# Altium PCB 24+Channel+PCB.pcbdoc (part 3 of 4)
Units mm, origin at the board's own origin, x right, y up, seen from the top; angles counter-clockwise.
Board outline 213.4 x 117.5 mm, 2 copper layers (Top Layer, Bottom Layer); 559 components, 339 nets, 1681 pads, 746 vias.
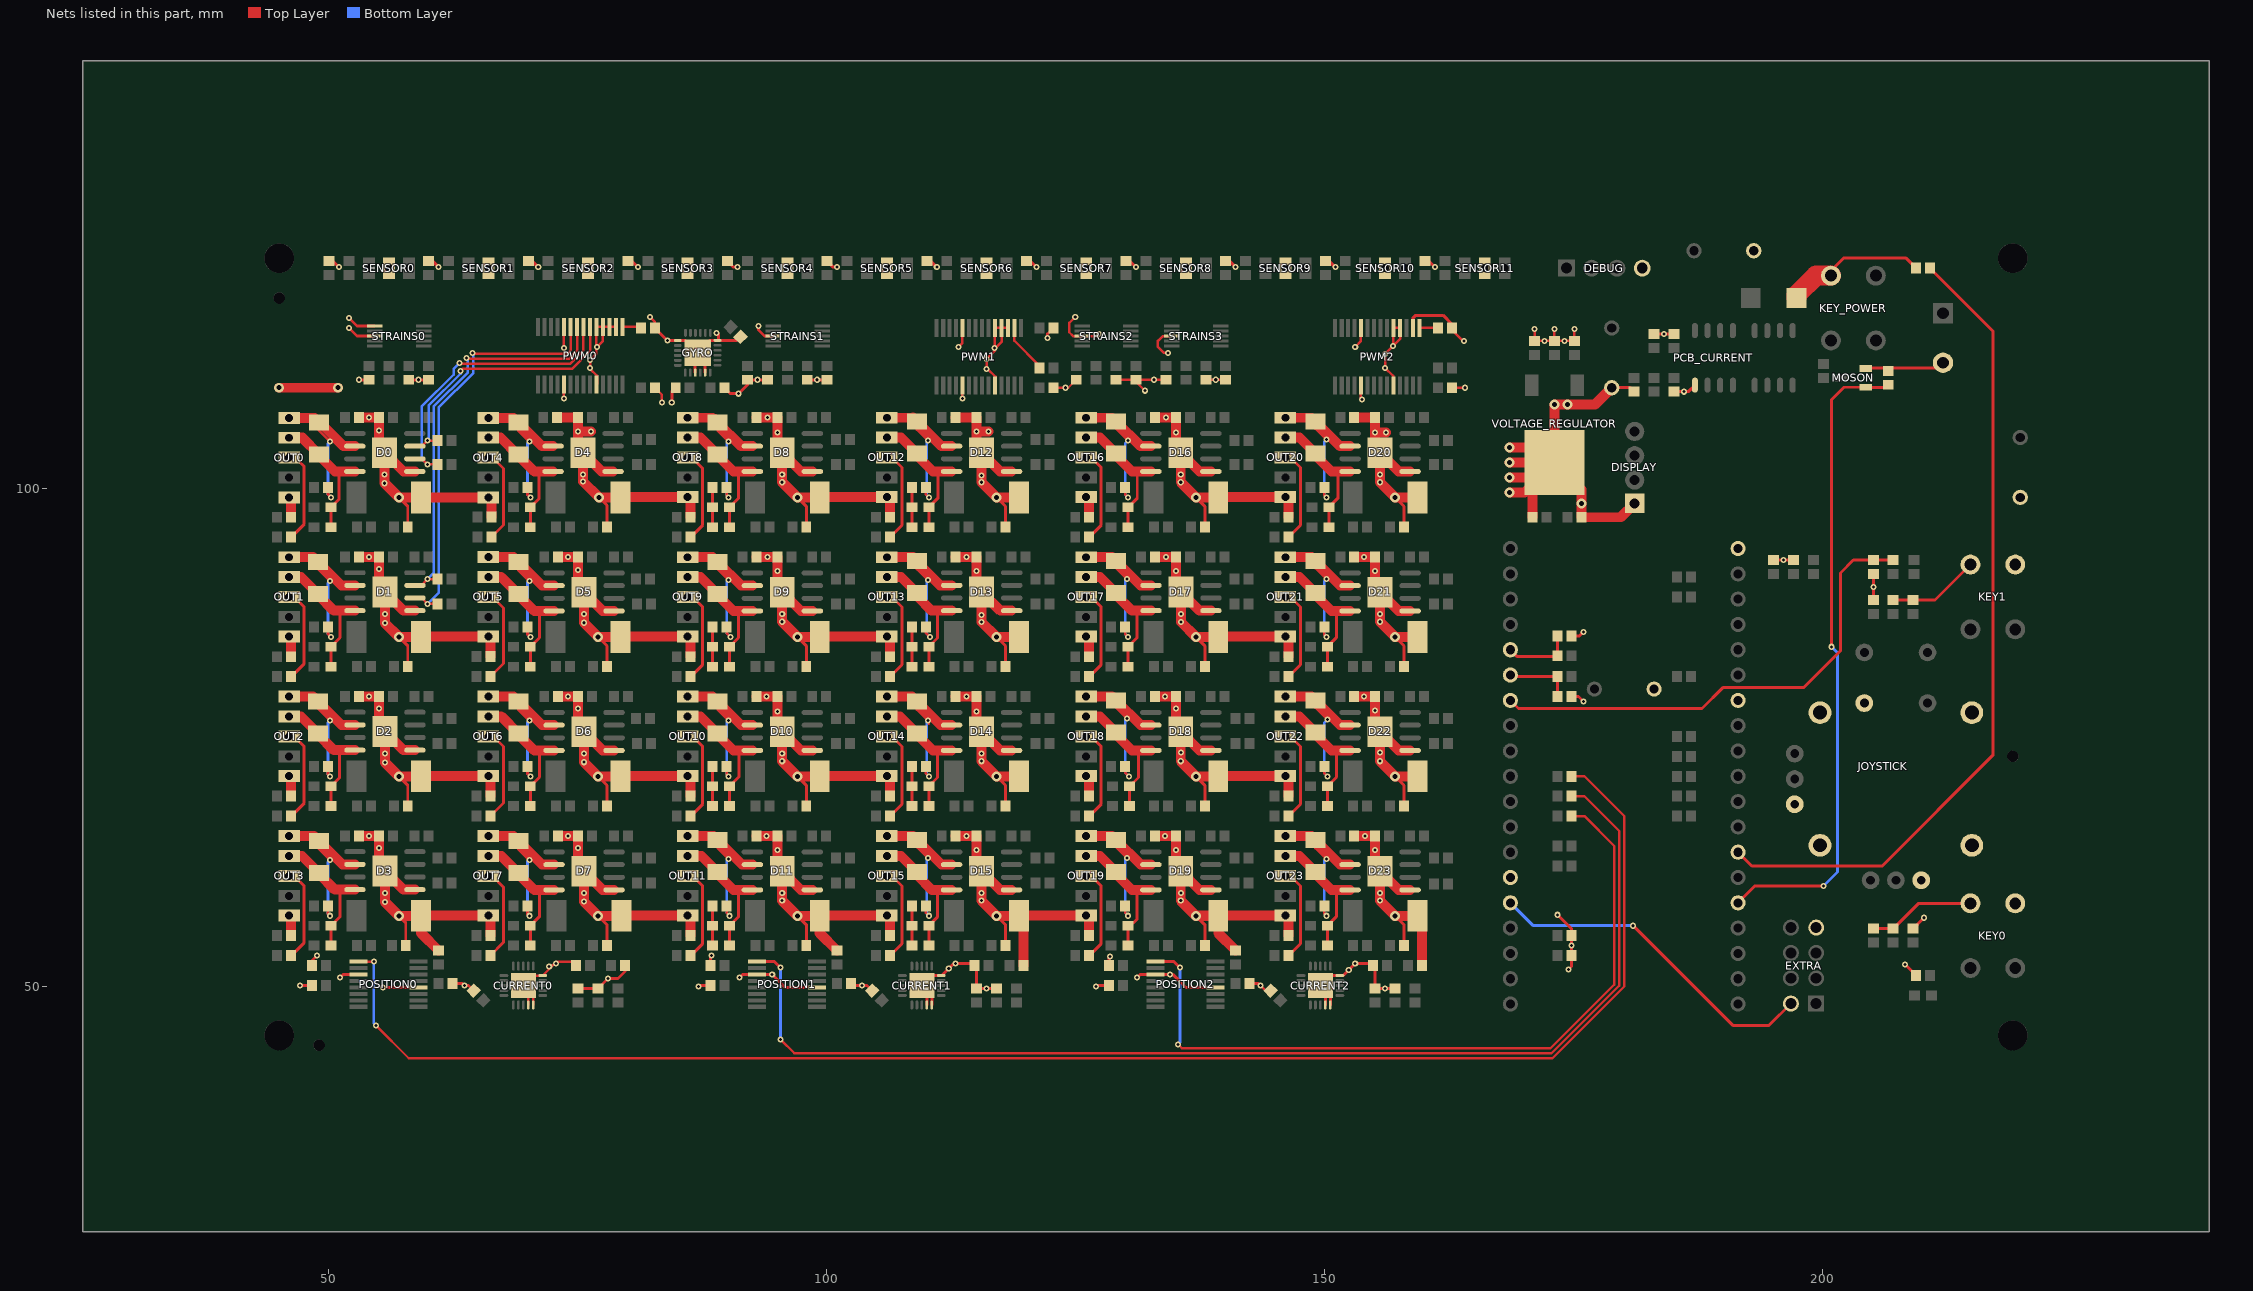
[diagram p3: the nets of this part, all layers, seen from the top]

## Via types
v1: diameter 0.61, hole 0.305, Top Layer to Bottom Layer, 627 vias
v2: diameter 1, hole 0.5, Top Layer to Bottom Layer, 113 vias
v3: diameter 2, hole 1, Top Layer to Bottom Layer, 6 vias

## Nets (pads, with @x,y where several pads share a name; then routed paths per layer and width w, separated by ;. In a path a pad name is that pad's centre, name@x,y a point inside that pad or via, vN(x,y) a via of type N, cw(c..) or ccw(c..) an arc to the next point about the centre after c; other vN are vias at no path point) (continued)
GND: BATTERY.2 C1.2 C2.2 C3.2 C4.2 CBTN0LP.2 CBTN1LP.2 CCD0.2 CCD1.2 CCD2.2 CCD.1 CCDD0.1 CCDD1.1 CCDD2.1 CCF.1 CCLP.1 CCREF0.2 CCREF1.2 CCREF2.2 CCREFIN0.1 CCREFIN1.1 CCREFIN2.1 CD0.1 CD1.1 CD2.1 CD3.1 CD4.1 CD5.1 CD6.1 CD7.1 CD8.1 CD9.1 CD10.1 CD11.1 CD12.1 CD13.1 CD14.1 CD15.1 CD16.1 CD17.1 CD18.1 CD19.1 CD20.1 CD21.1 CD22.1 CD23.1 CESPD3V.2 CESPD5V.2 CESPDD3V.2 CESPDD5V.2 CGC.1 CGL.1 CGR.2 CGV.1 CJ0LP.1 CJ1LP.1 CJBTNLP.1 CLP0.1 CLP1.2 CLP2.2 CLP3.2 CLP4.2 CLP5.2 CLP6.2 CLP7.2 CLP8.2 CLP9.2 CLP10.2 CLP11.2 CLP12.2 CLP13.2 CLP14.2 CLP15.1 CLP16.2 CLP17.2 CLP18.2 CLP19.2 CLP20.1 CLP21.2 CLP22.2 CLP23.2 CPDA0.2 CPDA1.2 CPDA2.2 CPDDA0.2 CPDDA1.2 CPDDA2.2 CPDDV0.2 CPDDV1.2 CPDDV2.2 CPDV0.2 CPDV1.2 CPDV2.2 CPLP0.2 CPLP1.2 CPLP2.2 CPLP3.2 CPLP4.2 CPLP5.2 CPLP6.2 CPLP7.2 CPLP8.2 CPLP9.2 CPLP10.2 CPLP11.2 CPLP12.2 CPLP13.2 CPLP14.2 CPLP15.2 CPLP16.2 CPLP17.2 CPLP18.2 CPLP19.2 CPLP20.2 CPLP21.2 CPLP22.2 CPLP23.2 CPWM0.2 CPWM1.2 CPWM2.2 CS0.2 CS1.2 CS2.2 CS3.2 CSDV0.1 CSDV1.1 CSDV2.1 CSDV3.1 CSLP0.1 CSLP1.1 CSLP2.1 CSLP3.1 CSLP4.1 CSLP5.1 CSLP6.1 CSLP7.1 CSLP8.1 CSLP9.1 CSLP10.1 CSLP11.1 CURRENT0.4 CURRENT0.5 CURRENT0.10 CURRENT0.21 CURRENT1.4 CURRENT1.5 CURRENT1.10 CURRENT1.21 CURRENT2.4 CURRENT2.5 CURRENT2.10 CURRENT2.21 CVLP.1 CVR1.1 CVR2.1 CVR3.1 D0.1 D0.9 D1.1 D1.9 D2.1 D2.9 D3.1 D3.9 D4.1 D4.9 D5.1 D5.9 D6.1 D6.9 D7.1 D7.9 D8.1 D8.9 D9.1 D9.9 D10.1 D10.9 D11.1 D11.9 D12.1 D12.9 D13.1 D13.9 D14.1 D14.9 D15.1 D15.9 D16.1 D16.9 D17.1 D17.9 D18.1 D18.9 D19.1 D19.9 D20.1 D20.9 D21.1 D21.9 D22.1 D22.9 D23.1 D23.9 DEBUG.4 DISPLAY.P$3 EXTRA.7 GYRO.1 GYRO.9 GYRO.11 GYRO.18 GYRO.25 JOYSTICK.B2A JOYSTICK.H3 JOYSTICK.MOUNT1 JOYSTICK.MOUNT2 JOYSTICK.MOUNT3 JOYSTICK.MOUNT4 JOYSTICK.V3 KEY0.1 KEY1.1 MOSON.2 OUT0.P1 OUT1.P1 OUT2.P1 OUT3.P1 OUT4.P1 OUT5.P1 OUT6.P1 OUT7.P1 OUT8.P1 OUT9.P1 OUT10.P1 OUT11.P1 OUT12.P1 OUT13.P1 OUT14.P1 OUT15.P1 OUT16.P1 OUT17.P1 OUT18.P1 OUT19.P1 OUT20.P1 OUT21.P1 OUT22.P1 OUT23.P1 pad.6 pad.32 pad.38 PCB_CURRENT.5 POSITION0.3 POSITION0.12 POSITION1.3 POSITION1.12 POSITION2.3 POSITION2.12 PWM0.2 PWM0.3 PWM0.4 PWM0.5 PWM0.10 PWM0.19 PWM0.24 PWM1.3 PWM1.4 PWM1.5 PWM1.10 PWM1.19 PWM1.24 PWM2.2 PWM2.4 PWM2.5 PWM2.10 PWM2.19 PWM2.24 R0.1 RCL0.1 RCL1.1 RCL2.1 RCL.1 RCTRL.1 REXT0.1 REXT1.1 REXT2.1 RL0.2 RL1.2 RL2.2 RL3.2 RL4.2 RL5.2 RL6.2 RL7.2 RL8.2 RL9.2 RL10.2 RL11.2 RL12.2 RL13.2 RL14.2 RL15.2 RL16.2 RL17.2 RL18.2 RL19.2 RL20.2 RL21.2 RL22.2 RL23.2 RS0.1 RS1.1 RS2.1 RS3.1 RS4.1 RS5.1 RS6.1 RS7.1 RS8.1 RS9.1 RS10.1 RS11.1 RS12.1 RS13.1 RS14.1 RS15.1 RS16.1 RS17.1 RS18.1 RS19.1 RS20.1 RS21.1 RS22.1 RS23.1 RSL0.2 RSL1.2 RSL2.2 RSL3.2 RVL.1 SENSOR0.P2 SENSOR1.P2 SENSOR2.P2 SENSOR3.P2 SENSOR4.P2 SENSOR5.P2 SENSOR6.P2 SENSOR7.P2 SENSOR8.P2 SENSOR9.P2 SENSOR10.P2 SENSOR11.P2 STRAINS0.1 STRAINS0.3 STRAINS1.3 STRAINS2.3 STRAINS3.3 VOLTAGE_REGULATOR.4 | length 991.4
  Top Layer w0.25: CURRENT0.4@70.1,48.15 70.1,49.6 CURRENT0.21@69.6,50.1 ; CURRENT0.5@70.6,48.15 70.6,49.1 CURRENT0.21@69.6,50.1 ; PWM0.19@73.678,110.419 73.677,109.123 73.7,109.1 v1(73.7,109) ; PWM0.10@73.678,116.21 73.678,114.122 v1(73.7,114.1) ; CCD0.2@74.9,52.1 74.5,52.5 73.1,52.5 v1(72.9,52.3) 72.75,52.3 CURRENT0.10@71.55,51.1 70.6,51.1 CURRENT0.21@69.6,50.1 ; PWM0.24@76.929,110.419 77,110.49 77,111.3 76.3,112 v1(76.3,112.1) v1(76.3,112.9) 76.929,113.529 PWM0.5@76.929,116.21 PWM0.2@78.885,116.21 ; v1(77,114.2) 77.589,114.789 PWM0.4@77.589,116.21 ; v1(82.3,117.2) 82.801,116.699 REXT0.1@82.801,116.001 ; CPWM0.2@82.8,110.1 83.5,109.4 v1(83.5,108.6) ; v1(113.3,114.2) 113.678,114.578 PWM1.10@113.678,116.11 ; PWM1.19@113.678,110.319 113.678,109.022 v1(113.7,109) ; v1(116.1,112) v1(116.1,113) 116.929,113.829 PWM1.5@116.929,116.11 PWM1.3@118.25,116.11 ; v1@116.1,112 116.199,112 117,111.2 117,110.39 PWM1.24@116.929,110.319 ; v1@116.9,114.101 117,114.101 117.599,114.698 PWM1.4@117.599,116.11 ; v1(122.2,115.1) 122.2,115.5 REXT1.1@122.8,116.1 ; CPWM1.2@122.8,110.1 v1(124,110.1) 124.3,110.1 CSDV2.1@125.1,110.9 ; v1(125,117.2) 124.4,116.6 124.4,115.8 124.4,115.671 124.782,115.29 STRAINS2.3@125.686,115.29 127.19,115.29 v1(127.4,115.5) ; RSL2.2@129.1,110.9 CS2.2@131.1,110.9 131.1,110.7 v1@132,109.8 ; CS2.2@131.1,110.9 v1(132.9,110.9) CSDV3.1@134.1,110.9 ; v1@134.299,113.601 133.901,113.601 133.301,114.2 133.301,114.8 133.789,115.29 STRAINS3.3@134.688,115.29 ; RSL3.2@138.1,110.9 v1(139.1,110.9) CS3.2@140.1,110.9 ; v1(153.1,114.2) 153.678,114.778 PWM2.10@153.678,116.11 ; PWM2.19@153.678,110.319 153.678,109.022 v1(153.8,108.9) ; v1(156.1,112.1) v1(156.1,113.5) ; v1(156.1,112.1) 156.9,111.299 156.9,110.347 PWM2.24@156.929,110.319 ; v1(156.1,113.5) v1(156.9,114.3) 156.929,114.329 PWM2.5@156.929,116.11 PWM2.4@157.589,116.11 157.599,115 v1(156.9,114.3) ; CPWM2.2@162.8,110.1 v1(164.1,110.1) ; REXT2.1@162.8,116.1 162.8,115.9 v1@164,114.7 ; v1(171.1,116) CVR3.1@171.1,114.8 v1(172.1,114.8) CVR1.1@173.1,114.8 ; v1(173.1,116) CVR1.1@173.1,114.8 ; v1(175.1,116) CVR2.1@175.1,114.8 v1(174.1,114.8) CVR1.1@173.1,114.8
  Top Layer w0.3: OUT3.P1@46.1,57.112 46.3,56.912 CPLP3.2@46.3,55.1 ; v1(47.2,50.1) CPDA0.2@48.4,50.1 ; CPDDA0.2@48.4,52.1 48.4,52.6 v1@48.9,53.1 ; CSLP0.1@50.1,122.8 50.5,122.8 v1(51.1,122.2) ; v1@51.2,50.9 51.518,51.217 POSITION0.3@53.062,51.217 ; v1(52.1,116.1) 52.909,115.291 STRAINS0.3@54.687,115.291 ; v1(52.1,117.1) 52.909,116.29 STRAINS0.1@54.687,116.29 ; v1(53.1,110.9) CSDV0.1@54.1,110.9 ; v1(55.5,49.9) 55.503,49.897 POSITION0.12@59.062,49.897 ; v2(57.1,57.1) 57.8,56.4 CLP3.2@57.8,54.1 ; v2(57.1,71.1) 58,70.2 CLP2.2@58,68.1 ; v2(57.1,85.1) 58,84.2 CLP1.2@58,82.1 ; v2(57.1,99.1) 58,98.2 CLP0.1@58,96.1 ; RSL0.2@58.1,110.9 v1(59.1,110.9) CS0.2@60.1,110.9 ; CSLP1.1@60.1,122.8 60.5,122.8 v1(61.1,122.2) ; CPDV0.2@62.5,50.3 63.5,50.3 v1(63.7,50.1) 64.1,50.1 CCREFIN0.1@64.605,49.595 ; CSLP2.1@70.1,122.8 70.5,122.8 v1(71.1,122.2) ; CCREF0.2@75.1,49.8 RCL0.1@77.1,49.8 v1(78.1,50.8) 79.1,50.8 79.8,51.5 CCDD0.1@79.8,52.1 ; v2(77.1,57.1) 78,56.2 CLP7.2@78,54.1 ; v2(77.1,71.1) 78,70.2 CLP6.2@78,68.1 ; v2(77.1,85.1) 78,84.2 CLP5.2@78,82.1 ; v2(77.2,99.1) 78,98.3 CLP4.2@78,96.1 ; CSLP3.1@80.1,122.8 80.5,122.8 v1(81.1,122.2) ; REXT0.1@82.8,116.1 v1(84.056,114.844) GYRO.1@85.1,114.844 85.855,114.845 GYRO.25@87.1,113.6 ; v1(84.5,108.6) 84.5,109.7 CGL.1@84.9,110.1 ; GYRO.9@86.856,111.613 86.856,113.356 GYRO.25@87.1,113.6 ; v1(87.2,50) 87.3,50.1 CPDA1.2@88.4,50.1 ; GYRO.11@87.854,111.613 87.854,112.846 GYRO.25@87.1,113.6 ; CPDDA1.2@88.4,52.1 88.4,53 v1@88.5,53.1 ; v1@89.2,115.5 89.2,114.955 GYRO.18@89.1,114.855 ; CGR.2@89.8,110.1 90.4,109.5 v1(91.2,109.5) 92.1,110.4 CGV.1@92.1,110.9 v1(93.1,110.9) CSDV1.1@94.1,110.9 ; CSLP4.1@90.1,122.8 90.7,122.2 v1(91.1,122.2) ; v1(91.3,50.9) 91.618,51.217 POSITION1.3@93.062,51.217 v1(94.582,51.217) 95.903,49.897 POSITION1.12@99.062,49.897 ; CGC.1@91.395,115.205 91.045,114.855 GYRO.18@89.1,114.855 ; v1@93.2,116.301 93.2,115.899 93.809,115.29 STRAINS1.3@94.688,115.29 ; v2(97.1,57.1) 98,56.2 CLP11.2@98,54.1 ; v2(97.1,71.1) 98,70.2 CLP10.2@98,68.1 ; v2(97.1,85.1) 98,84.2 CLP9.2@98,82.1 ; v2(97.1,99.1) 98,98.2 CLP8.2@98,96.1 ; RSL1.2@98.1,110.9 v1(99.1,110.9) CS1.2@100.1,110.9 ; CSLP5.1@100.1,122.8 100.7,122.2 v1(101.1,122.2) ; CPDV1.2@102.5,50.3 102.7,50.1 v1(103.6,50.1) 104.1,50.1 CCREFIN1.1@104.605,49.595 ; CURRENT1.4@110.1,48.15 110.1,49.6 CURRENT1.21@109.6,50.1 ; CSLP6.1@110.1,122.8 110.5,122.8 v1(111.1,122.2) ; CURRENT1.5@110.6,48.15 110.6,49.1 CURRENT1.21@109.6,50.1 ; RCL1.1@117.1,49.8 v1(116.1,49.8) CCREF1.2@115.1,49.8 115.1,51.9 CCD1.2@114.9,52.1 114.7,52.3 v1(113,52.3) 112.8,52.3 v1(112.3,51.8) 111.6,51.1 CURRENT1.10@111.55,51.1 110.6,51.1 CURRENT1.21@109.6,50.1 ; v2(117.1,57.1) 118,56.2 CLP15.1@118,54.1 ; v2(117.1,71.1) 118,70.2 CLP14.2@118,68.1 ; v2(117.1,85.1) 118,84.2 CLP13.2@118,82.1 ; v2(117.1,99.1) 118,98.2 CLP12.2@118,96.1 ; CSLP7.1@120.1,122.8 120.5,122.8 v1(121.1,122.2) ; v1(127.1,50) 127.2,50.1 CPDA2.2@128.4,50.1 ; CPDDA2.2@128.4,52.1 128.4,52.9 v1(128.5,53) ; CSLP8.1@130.1,122.8 130.5,122.8 v1(131.1,122.2) ; v1(131.2,50.9) 131.518,51.217 POSITION2.3@133.062,51.217 ; POSITION2.3@133.062,51.218 v1(134.5,51.218) 134.782,51.218 136.103,49.897 POSITION2.12@139.062,49.897 ; v2(137.1,57.1) 138,56.2 CLP19.2@138,54.1 ; v2(137.1,71.1) 138,70.2 CLP18.2@138,68.1 ; v2(137.1,85.1) 138,84.2 CLP17.2@138,82.1 ; v2(137.1,99.1) 138,98.2 CLP16.2@138,96.1 ; CSLP9.1@140.1,122.8 140.5,122.8 v1(141.1,122.2) ; CPDDV2.2@142.5,50.3 143.4,50.3 143.6,50.1 144.105,49.595 CCREFIN2.1@144.605,49.595 ; CURRENT2.4@150.1,48.15 150.1,49.6 CURRENT2.21@149.6,50.1 ; CSLP10.1@150.1,122.8 150.5,122.8 v1(151.1,122.2) ; CURRENT2.5@150.6,48.15 150.6,49.1 CURRENT2.21@149.6,50.1 ; RCL2.1@157.1,49.8 v1(156.1,49.8) CCREF2.2@155.1,49.8 155.1,51.9 CCD2.2@154.9,52.1 154.7,52.3 v1(153.1,52.3) v1(152.45,51.65) 151.9,51.1 CURRENT2.10@151.55,51.1 150.6,51.1 CURRENT2.21@149.6,50.1 ; v2(157.1,57.1) 158,56.2 CLP23.2@158,54.1 ; v2(157.1,71.1) 158,70.2 CLP22.2@158,68.1 ; v2(157.1,85.1) 158,84.2 CLP21.2@158,82.1 ; v2(157.1,99.1) 158,98.2 CLP20.1@158,96.1 ; PWM2.2@158.885,116.11 158.885,117.085 159.171,117.371 161.929,117.371 162.8,116.5 REXT2.1@162.8,116.1 ; CSLP11.1@160.1,122.8 160.5,122.8 v1(161.1,122.2) ; v1(173.4,57.2) 174.8,55.8 CESPDD5V.2@174.8,55.1 v1(174.8,54.1) CESPD5V.2@174.8,53.1 174.8,52 v1(174.5,51.7) ; CJ1LP.1@174.8,79.1 175.5,79.1 v1(176,78.6) ; CJ0LP.1@174.8,85.2 175.6,85.2 v1@175.9,85.5 ; C1.2@178.85,110.1 180.7,110.1 RCL.1@181.1,109.7 ; CCF.1@183.1,115.5 v1(184.1,115.5) CCD.1@185.1,115.5 ; CCLP.1@185.1,109.7 v1(186.1,109.7) 186.535,109.7 PCB_CURRENT.5@187.195,110.36 ; RVL.1@195.1,92.8 v1(196.1,92.8) CVLP.1@197.1,92.8 ; MOSON.2@204.35,112.05 204.401,112.1 206.301,112.1 RCTRL.1@206.6,111.8 206.9,112.1 211.589,112.1 BATTERY.2@212.1,112.61 ; CBTN1LP.2@205.1,88.8 v1(205.1,90.1) CJBTNLP.1@205.1,91.4 ; v1(208.3,52.2) R0.1@209.4,51.1 ; CBTN0LP.2@209.1,55.8 v1@210.1,56.8 ; GYRO.25@87.1,113.6 88.355,114.855 GYRO.18@89.1,114.855
  Top Layer w1: v2(45.1,110.1) v2(51,110.1) ; OUT3.P1@46.1,57.112 46.3,56.912 CPLP3.2@46.3,55.1 ; OUT2.P1@46.1,71.112 46.3,70.912 CPLP2.2@46.3,69.1 ; OUT1.P1@46.1,85.112 46.3,84.912 CPLP1.2@46.3,83.1 ; OUT0.P1@46.1,99.088 46.3,98.888 CPLP0.2@46.3,97.1 ; CD3.1@53.1,65.124 v1(54.1,65.124) 55.076,65.124 RL3.2@55.1,65.1 v1(55.1,63.9) 55.1,62.2 D3.9@55.7,61.6 ; CD2.1@53.1,79.1 v1(54.1,79.1) RL2.2@55.1,79.1 v1(55.1,77.9) 55.1,76.2 D2.9@55.7,75.6 ; CD1.1@53.1,93.1 v1(54.1,93.1) 55.1,93.1 v1(55.1,91.9) 55.1,90.2 D1.9@55.7,89.6 ; CD0.1@53.1,107.1 v1(54.1,107.1) RL0.2@55.1,107.1 v1(55.1,105.8) 55.1,104.162 D0.9@55.687,103.575 ; D0.1@58.71,101.695 57.567,101.695 D0.9@55.687,103.575 ; D3.1@58.723,59.72 57.58,59.72 D3.9@55.7,61.6 ; D2.1@58.723,73.72 57.58,73.72 D2.9@55.7,75.6 ; D1.1@58.723,87.72 57.58,87.72 D1.9@55.7,89.6 ; RS0.1@59.351,99.1 v2(57.1,99.1) ; CPDDV0.2@61.1,53.6 59.351,55.349 RS3.1@59.351,57.1 ; CPLP7.2@66.3,55.112 66.3,56.912 OUT7.P1@66.1,57.112 59.364,57.112 RS3.1@59.351,57.1 ; CPLP6.2@66.3,69.112 66.3,70.925 OUT6.P1@66.1,71.124 59.376,71.124 RS2.1@59.351,71.1 v2(57.1,71.1) v1(55.7,72.5) v1(55.7,73.4) D2.9@55.7,75.6 ; CPLP5.2@66.3,83.112 66.3,84.925 OUT5.P1@66.1,85.124 59.376,85.124 RS1.1@59.351,85.1 v2(57.1,85.1) v1(55.7,86.5) v1(55.7,87.4) D1.9@55.7,89.6 ; CPLP4.2@66.4,97.124 66.4,98.8 OUT4.P1@66.1,99.1 v2(57.1,99.1) ; CD4.1@73,107.112 73.012,107.1 RL4.2@75.1,107.1 v1(75.1,105.7) ; CD7.1@73.1,65.112 v1(74.1,65.112) 75.088,65.112 RL7.2@75.1,65.1 v1(75.1,63.9) 75.1,62.162 D7.9@75.687,61.575 ; CD6.1@73.1,79.112 v1(74.1,79.112) 75.088,79.112 RL6.2@75.1,79.1 v1(75.1,77.9) 75.1,76.162 D6.9@75.687,75.575 ; CD5.1@73.1,93.112 v1(74.1,93.112) 75.088,93.112 RL5.2@75.1,93.1 v1(75.1,91.8) 75.1,90.162 D5.9@75.687,89.575 ; v1(76.4,105.7) v1(75.1,105.7) ; D4.1@78.61,101.695 77.467,101.695 D4.9@75.587,103.575 ; D7.1@78.71,59.695 77.567,59.695 D7.9@75.687,61.575 ; D6.1@78.71,73.695 77.567,73.695 D6.9@75.687,75.575 ; D5.1@78.71,87.695 77.567,87.695 D5.9@75.687,89.575 ; CPLP11.2@86.4,55.1 86.4,56.812 OUT11.P1@86.1,57.112 79.464,57.112 RS7.1@79.451,57.1 v2(77.1,57.1) v1(75.687,58.513) v1(75.687,59.4) D7.9@75.687,61.575 ; CPLP10.2@86.4,69.1 86.4,70.812 OUT10.P1@86.1,71.112 79.363,71.112 RS6.1@79.351,71.1 v2(77.1,71.1) v1(75.687,72.513) v1(75.687,73.4) D6.9@75.687,75.575 ; CPLP9.2@86.4,83.1 86.4,84.812 OUT9.P1@86.1,85.112 79.363,85.112 RS5.1@79.351,85.1 v2(77.1,85.1) v1(75.687,86.513) v1(75.687,87.4) D5.9@75.687,89.575 ; CPLP8.2@86.4,97.1 86.4,98.812 OUT8.P1@86.1,99.112 79.363,99.112 RS4.1@79.351,99.1 v2(77.2,99.1) v1(75.6,100.7) 75.6,101.387 v1(75.587,101.4) D4.9@75.587,103.575 ; CD11.1@93,65.1 v1(94,65.1) RL11.2@95.1,65.1 v1(95.1,63.7) 95.1,62.062 D11.9@95.587,61.575 ; CD10.1@93,79.1 v1(94,79.1) RL10.2@95.1,79.1 ; CD9.1@93,93.1 94.1,93.1 95.1,93.1 v1(95.1,91.7) 95.1,90.062 D9.9@95.587,89.575 ; CD8.1@93,107.1 v1(94.1,107.1) RL8.2@95.1,107.1 v1(95.1,105.6) 95.1,104.061 D8.9@95.587,103.575 ; RL10.2@95.1,79.1 v1(95.1,77.6) 95.1,76.062 D10.9@95.587,75.575 ; D11.1@98.61,59.695 97.467,59.695 D11.9@95.587,61.575 ; D10.1@98.61,73.695 97.467,73.695 D10.9@95.587,75.575 ; D9.1@98.61,87.695 97.467,87.695 D9.9@95.587,89.575 ; D8.1@98.61,101.695 97.467,101.695 D8.9@95.587,103.575 ; CPDDV1.2@101.1,53.6 99.351,55.349 RS11.1@99.351,57.1 ; CPLP15.2@106.4,55.1 106.4,56.813 OUT15.P1@106.1,57.112 99.364,57.112 RS11.1@99.351,57.1 ; CPLP14.2@106.4,69.1 106.4,70.813 OUT14.P1@106.1,71.112 99.363,71.112 RS10.1@99.351,71.1 v2(97.1,71.1) v1(95.587,72.613) v1(95.587,73.4) D10.9@95.587,75.575 ; CPLP13.2@106.4,83.1 106.4,84.813 OUT13.P1@106.1,85.112 99.363,85.112 RS9.1@99.351,85.1 v2(97.1,85.1) v1(95.587,86.613) v1(95.587,87.4) D9.9@95.587,89.575 ; CPLP12.2@106.4,97.1 106.4,98.813 OUT12.P1@106.1,99.112 99.363,99.112 RS8.1@99.351,99.1 v2(97.1,99.1) v1(95.587,100.613) v1(95.587,101.4) D8.9@95.587,103.575 ; CD15.1@113,65.1 v1(114.1,65.1) RL15.2@115.1,65.1 v1(115.1,63.7) 115.1,62.062 D15.9@115.587,61.575 ; CD14.1@113,79.1 v1(114.1,79.1) RL14.2@115.1,79.1 v1(115.1,77.6) 115.1,76.062 D14.9@115.587,75.575 ; CD13.1@113,93.1 v1(114.1,93.1) RL13.2@115.1,93.1 v1(115.1,91.7) 115.1,90.1 D13.9@115.6,89.6 ; CD12.1@113,107.1 114,107.1 RL12.2@115.1,107.1 v1(115.1,105.7) ; v1(116.3,105.7) v1(115.1,105.7) ; D15.1@118.61,59.695 117.467,59.695 D15.9@115.587,61.575 ; D14.1@118.61,73.695 117.467,73.695 D14.9@115.587,75.575 ; D12.1@118.61,101.695 117.467,101.695 D12.9@115.587,103.575 ; D13.1@118.623,87.72 117.48,87.72 D13.9@115.6,89.6 ; RS14.1@119.351,71.1 v2(117.1,71.1) v1(115.587,72.613) v1(115.587,73.4) D14.9@115.587,75.575 ; RS13.1@119.351,85.1 v2(117.1,85.1) v1(115.6,86.6) v1(115.6,87.3) D13.9@115.6,89.6 ; RS12.1@119.351,99.1 v2(117.1,99.1) v1(115.587,100.613) v1(115.587,101.3) D12.9@115.587,103.575 ; CCDD1.1@119.8,52.1 119.8,56.651 RS15.1@119.351,57.1 ; OUT18.P1@126.1,71.112 126.4,70.812 CPLP18.2@126.4,69.1 ; OUT17.P1@126.1,85.112 126.4,84.812 CPLP17.2@126.4,83.1 ; OUT16.P1@126.1,99.112 126.4,98.812 CPLP16.2@126.4,97.1 ; CPLP19.2@126.4,55.1 126.4,56.812 OUT19.P1@126.1,57.112 119.364,57.112 RS15.1@119.351,57.1 ; CD19.1@133,65.1 v1(134,65.1) RL19.2@135.1,65.1 v1(135.1,63.7) 135.1,62.062 D19.9@135.587,61.575 ; CD17.1@133,93.1 134.1,93.1 RL17.2@135.1,93.1 v1(135.1,91.7) 135.1,90.1 D17.9@135.6,89.6 ; CD16.1@133,107.1 v1(134.1,107.1) RL16.2@135.1,107.1 v1(135.1,105.6) 135.1,104.062 D16.9@135.587,103.575 ; CD18.1@133,79.1 v1(134,79.1) RL18.2@135.1,79.1 v1(135.1,77.9) 135.1,76.062 D18.9@135.587,75.575 ; D19.1@138.61,59.695 137.467,59.695 D19.9@135.587,61.575 ; D18.1@138.61,73.695 137.467,73.695 D18.9@135.587,75.575 ; D16.1@138.61,101.695 137.467,101.695 D16.9@135.587,103.575 ; D17.1@138.623,87.72 137.48,87.72 D17.9@135.6,89.6 ; CPDV2.2@141.1,53.6 139.351,55.349 RS19.1@139.351,57.1 v2(137.1,57.1) ; CPLP23.2@146.4,55.1 146.4,56.812 OUT23.P1@146.1,57.112 137.112,57.112 v2(137.1,57.1) ; CPLP22.2@146.4,69.1 146.4,70.812 OUT22.P1@146.1,71.112 139.363,71.112 RS18.1@139.351,71.1 v2(137.1,71.1) v1(135.587,72.613) 135.587,73.4 D18.9@135.587,75.575 ; CPLP21.2@146.4,83.1 146.4,84.812 OUT21.P1@146.1,85.112 139.363,85.112 RS17.1@139.351,85.1 v2(137.1,85.1) v1(135.6,86.6) v1(135.6,87.4) D17.9@135.6,89.6 ; CPLP20.2@146.4,97.1 146.4,98.812 OUT20.P1@146.1,99.112 139.363,99.112 RS16.1@139.351,99.1 v2(137.1,99.1) v1(135.587,100.613) v1(135.587,101.4) D16.9@135.587,103.575 ; CD23.1@153,65.1 v1(154.1,65.1) RL23.2@155.1,65.1 v1(155.1,63.7) 155.1,62.062 D23.9@155.587,61.575 ; CD22.1@153,79.1 v1(154,79.1) RL22.2@155.1,79.1 v1(155.1,77.7) 155.1,76.062 D22.9@155.587,75.575 ; CD21.1@153,93.1 154,93.1 RL21.2@155.1,93.1 v1(155.1,91.7) 155.1,90.062 D21.9@155.587,89.575 ; CD20.1@153,107.1 RL20.2@155.1,107.1 ; RL20.2@155.1,107.1 v1(155.1,105.6) ; v1(156.2,105.6) v1(155.1,105.6) ; D23.1@158.61,59.695 157.467,59.695 D23.9@155.587,61.575 ; D22.1@158.61,73.695 157.467,73.695 D22.9@155.587,75.575 ; D21.1@158.61,87.695 157.467,87.695 D21.9@155.587,89.575 ; D20.1@158.61,101.695 157.467,101.695 D20.9@155.587,103.575 ; RS22.1@159.351,71.1 v2(157.1,71.1) v1(155.587,72.612) v1(155.587,73.5) D22.9@155.587,75.575 ; RS21.1@159.351,85.1 v2(157.1,85.1) v1(155.587,86.613) v1(155.587,87.4) D21.9@155.587,89.575 ; RS20.1@159.351,99.1 v2(157.1,99.1) v1(155.587,100.613) v1(155.587,101.4) D20.9@155.587,103.575 ; CCDD2.1@159.8,52.1 159.8,56.651 RS23.1@159.351,57.1 v2(157.1,57.1) v1(155.587,58.612) v1(155.587,59.4) D23.9@155.587,61.575 ; v2(168.6,99.6) 170.101,99.6 VOLTAGE_REGULATOR.4@173.1,102.6 ; v2(168.6,101.1) 171.601,101.1 VOLTAGE_REGULATOR.4@173.1,102.6 ; v2(168.6,102.6) VOLTAGE_REGULATOR.4@173.1,102.6 ; v2(168.6,104.1) 171.6,104.1 VOLTAGE_REGULATOR.4@173.1,102.6 ; CESPD3V.2@170.9,97.1 170.9,100.4 VOLTAGE_REGULATOR.4@173.1,102.6 ; C1.2@178.851,110.101 177.149,108.399 v2(174.4,108.399) v2(173.1,108.399) VOLTAGE_REGULATOR.4@173.1,102.6 ; DISPLAY.P$3@181.151,98.495 179.756,97.1 CESPDD3V.2@175.8,97.1 175.8,98.6 175.8,99.9 VOLTAGE_REGULATOR.4@173.1,102.6 ; D0.9@55.687,103.575 v1(55.687,101.4) v1(55.687,100.513) v2(57.1,99.1) ; D3.9@55.7,61.6 v1(55.7,59.4) v1(55.7,58.5) v2(57.1,57.1) RS3.1@59.351,57.1 ; v1(75.1,105.7) 75.1,104.062 D4.9@75.587,103.575 ; D11.9@95.587,61.575 v1(95.587,59.4) v1(95.587,58.613) v2(97.1,57.1) RS11.1@99.351,57.1 ; v1(115.1,105.7) 115.1,104.062 D12.9@115.587,103.575 ; D15.9@115.587,61.575 v1(115.587,59.4) v1(115.587,58.613) v2(117.1,57.1) RS15.1@119.351,57.1 ; D19.9@135.587,61.575 135.587,59.2 v1(135.587,58.613) v2(137.1,57.1) ; v1(155.1,105.6) 155.1,104.062 D20.9@155.587,103.575
  other v1: 143.6,50.1 51.2,50.9 72.2,52 48.9,53.1 88.5,53.1 210.2,56.9 135.6,59.4 135.6,73.5 176,85.6 94.1,93.1 134.1,93.1 154,93.1 132,109.8 134.3,113.6 116.9,114.1 164,114.8 89,115.6 93.2,116.3
  other v2: 175.8,98.5
J0: CJ0LP.2 pad.15 RJ0LP.2 | length 7
  Top Layer w0.3: pad.15@168.67,83.8 169.37,83.1 173.4,83.1 CJ0LP.2@173.4,85.1
J1: CJ1LP.2 pad.14 RJ1LP.2 | length 6.8
  Top Layer w0.3: pad.14@168.67,81.26 168.83,81.1 RJ1LP.2@173.4,81.1 CJ1LP.2@173.4,79.1
JBTN: CJBTNLP.2 pad.13 RJBTNL.2 | length 49.5
  Top Layer w0.3: pad.13@168.671,78.721 169.491,77.901 187.901,77.901 189.999,79.999 198.099,79.999 201.8,83.7 201.8,91.5 203.1,92.801 205.099,92.801 RJBTNL.2@207.1,92.8
KEY0_3: KEY0.3 RBTN0H.2 RBTN0L.2 | length 10.8
  Top Layer w0.3: RBTN0H.2@205.1,55.8 RBTN0L.2@207.1,55.8 209.65,58.35 KEY0.3@214.85,58.35
KEY1_3: KEY1.3 RBTN1H.2 RBTN1L.2 | length 9.2
  Top Layer w0.3: RBTN1L.2@207.1,88.8 211.3,88.8 KEY1.3@214.85,92.35
KEY_POWER_3: DPOW.2 KEY_POWER.3 RPOW.2 | length 14.5
  Top Layer w0.3: KEY_POWER.3@200.85,121.35 200.85,121.85 202.1,123.1 208.4,123.1 RPOW.2@209.4,122.1
  Top Layer w2: DPOW.2@197.401,119.1 197.401,119.399 199.349,121.35 KEY_POWER.3@200.85,121.35
LEDG8_2: LEDG8.2 LEDY8.1 RM8.2 | length 4
  Top Layer w0.3: LEDY8.1@88.6,96.1 RM8.2@88.6,100.1
LEDG9_2: LEDG9.2 LEDY9.1 RM9.2 | length 4
  Top Layer w0.3: LEDY9.1@88.6,82.1 RM9.2@88.6,86.1
LEDG10_2: LEDG10.2 LEDY10.1 RM10.2 | length 4
  Top Layer w0.3: LEDY10.1@88.6,68.1 RM10.2@88.6,72.1
LEDG11_2: LEDG11.2 LEDY11.1 RM11.2 | length 4
  Top Layer w0.3: LEDY11.1@88.6,54.1 LEDG11.2@88.6,56.1 RM11.2@88.6,58.1
LEDG12_2: LEDG12.2 LEDY12.1 RM12.2 | length 4
  Top Layer w0.3: LEDY12.1@108.6,96.1 RM12.2@108.6,100.1
LEDG13_2: LEDG13.2 LEDY13.1 RM13.2 | length 4
  Top Layer w0.3: LEDY13.1@108.6,82.1 RM13.2@108.6,86.1
LEDG14_2: LEDG14.2 LEDY14.1 RM14.2 | length 4
  Top Layer w0.3: LEDY14.1@108.6,68.1 RM14.2@108.6,72.1
LEDG15_2: LEDG15.2 LEDY15.1 RM15.2 | length 4
  Top Layer w0.3: LEDY15.1@108.6,54.1 RM15.2@108.6,58.1
M0A: CM0.2 D0.6 OUT0.P5 RM0.1 | length 17
  Top Layer w0.3: CM0.2@49.1,106.6 49.1,105.8 v1(50.2,104.7) ; RM0.1@50,100.1 50,99.4 v1(50.3,99.1)
  Top Layer w1: OUT0.P5@46.1,107.063 48.636,107.063 CM0.2@49.1,106.6 ; CM0.2@49.1,106.6 49.202,106.6 51.564,104.236 D0.6@52.689,104.236
  Bottom Layer w0.3: v1@50.2,104.701 49.999,104.5 49.999,99.401 v1(50.3,99.1)
M0B: CM0.1 D0.8 LEDG0.1 LEDY0.2 OUT0.P4 | length 14
  Top Layer w0.3: LEDY0.2@50.302,96.1 LEDG0.1@50.302,98.1 51.099,98.897 51.099,101.6 51.005,101.694
  Top Layer w1: OUT0.P4@46.1,105.082 47.418,105.082 CM0.1@49.1,103.4 ; CM0.1@49.1,103.4 49.1,103.301 50.706,101.696 D0.8@52.689,101.696
M1A: CM1.2 D1.6 OUT1.P5 RM1.1 | length 17.1
  Top Layer w0.3: CM1.2@49,92.6 49,91.9 v1(50.2,90.7) ; RM1.1@50,86.1 50,85.4 v1(50.3,85.1)
  Top Layer w1: OUT1.P5@46.1,93.088 48.512,93.088 CM1.2@49,92.6 51.34,90.26 D1.6@52.703,90.26
  Bottom Layer w0.3: v1(50.2,90.7) 50,90.5 50,85.4 v1(50.3,85.1)
M1B: CM1.1 D1.8 LEDG1.1 LEDY1.2 OUT1.P4 | length 14.1
  Top Layer w0.3: LEDY1.2@50.302,82.1 LEDG1.1@50.302,84.1 51.21,85.007 51.21,87.721
  Top Layer w1: OUT1.P4@46.1,91.107 47.294,91.107 CM1.1@49,89.4 ; CM1.1@49.001,89.4 49.001,89.3 50.579,87.721 D1.8@52.703,87.72
M2A: CM2.2 D2.6 OUT2.P5 RM2.1 | length 17
  Top Layer w0.3: CM2.2@49,78.6 49,77.9 v1(50.2,76.7) ; RM2.1@50,72.1 49.999,71.3 v1(50.2,71.1)
  Top Layer w1: OUT2.P5@46.1,79.088 48.512,79.088 CM2.2@49,78.6 51.34,76.26 D2.6@52.703,76.26
  Bottom Layer w0.3: v1(50.2,71.1) 50,71.3 50,76.5 v1(50.2,76.7)
M2B: CM2.1 D2.8 LEDG2.1 LEDY2.2 OUT2.P4 | length 14
  Top Layer w0.3: LEDY2.2@50.302,68.1 LEDG2.1@50.302,70.1 51.174,70.972 51.174,73.72
  Top Layer w1: OUT2.P4@46.1,77.107 47.293,77.107 CM2.1@49,75.4 ; CM2.1@49.001,75.399 49.001,75.3 50.579,73.72 D2.8@52.703,73.72
M3A: CM3.2 D3.6 OUT3.P5 RM3.1 | length 17
  Top Layer w0.3: CM3.2@49.1,64.6 49.1,63.8 v1(50.2,62.7) ; RM3.1@50,58.1 50,57.3 v1(50.2,57.1)
  Top Layer w1: OUT3.P5@46.1,65.088 48.612,65.088 CM3.2@49.1,64.6 51.44,62.26 D3.6@52.703,62.26
  Bottom Layer w0.3: v1(50.2,57.1) 50,57.3 50,62.5 v1(50.2,62.7)
M3B: CM3.1 D3.8 LEDG3.1 LEDY3.2 OUT3.P4 | length 14.1
  Top Layer w0.3: LEDY3.2@50.302,54.1 LEDG3.1@50.302,56.1 51.224,57.023 51.224,59.72
  Top Layer w1: OUT3.P4@46.1,63.106 47.393,63.106 CM3.1@49.1,61.4 ; CM3.1@49.1,61.4 49.1,61.3 50.68,59.72 D3.8@52.703,59.72
M4A: CM4.2 D4.6 OUT4.P5 RM4.1 | length 18.1
  Top Layer w0.3: CM4.2@69.1,106.6 69.1,105.8 v1(70.2,104.7) ; 70,99.4 v1(70.3,99.1) 70,99.4 ; 70,99.4 RM4.1@70,100.1 70,99.4
  Top Layer w1: OUT4.P5@66.1,107.076 68.624,107.076 CM4.2@69.1,106.6 71.465,104.235 D4.6@72.59,104.235
  Bottom Layer w0.3: v1(70.2,104.7) 70,104.5 70,99.4 v1(70.3,99.1)
M4B: CM4.1 D4.8 LEDG4.1 LEDY4.2 OUT4.P4 | length 14
  Top Layer w0.3: LEDY4.2@70.302,96.1 LEDG4.1@70.302,98.1 71.193,98.991 71.193,101.694
  Top Layer w1: OUT4.P4@66.1,105.094 67.305,105.094 CM4.1@69.1,103.299 ; CM4.1@69.1,103.4 CM4.1@69.1,103.299 ; D4.8@72.59,101.695 70.705,101.694 CM4.1@69.1,103.299
M5A: CM5.2 D5.6 OUT5.P5 RM5.1 | length 17.1
  Top Layer w0.3: CM5.2@69.1,92.6 69.1,91.8 v1(70.2,90.7) ; RM5.1@70,86.1 70,85.4 v1(70.3,85.1)
  Top Layer w1: OUT5.P5@66.1,93.1 68.6,93.1 CM5.2@69.1,92.6 71.465,90.235 D5.6@72.69,90.235
  Bottom Layer w0.3: v1(70.2,90.7) 70,90.5 70,85.4 v1(70.3,85.1)
M5B: CM5.1 D5.8 LEDG5.1 LEDY5.2 OUT5.P4 | length 14
  Top Layer w0.3: LEDY5.2@70.302,82.1 LEDG5.1@70.302,84.1 71.215,85.013 71.215,87.695
  Top Layer w1: OUT5.P4@66.1,91.119 67.381,91.119 CM5.1@69.1,89.4 ; CM5.1@69.1,89.4 69.1,89.3 70.705,87.695 D5.8@72.69,87.695
M6A: CM6.2 D6.6 OUT6.P5 RM6.1 | length 17.1
  Top Layer w0.3: CM6.2@69.1,78.6 69.1,77.8 v1(70.2,76.7) ; RM6.1@70,72.1 70,71.4 v1(70.3,71.1)
  Top Layer w1: OUT6.P5@66.1,79.1 68.6,79.1 CM6.2@69.1,78.6 71.465,76.235 D6.6@72.69,76.235
  Bottom Layer w0.3: v1(70.2,76.7) 70,76.5 70,71.4 v1(70.3,71.1)
M6B: CM6.1 D6.8 LEDG6.1 LEDY6.2 OUT6.P4 | length 14
  Top Layer w0.3: LEDY6.2@70.302,68.1 LEDG6.1@70.302,70.1 71.213,71.011 71.213,73.695
  Top Layer w1: OUT6.P4@66.1,77.119 67.381,77.119 CM6.1@69.1,75.4 ; CM6.1@69.1,75.4 69.1,75.3 70.705,73.695 D6.8@72.69,73.695
M7A: CM7.2 D7.6 OUT7.P5 RM7.1 | length 17
  Top Layer w0.3: CM7.2@69.1,64.6 69.1,63.8 v1(70.2,62.7) ; RM7.1@70,58.1 70,57.3 v1(70.2,57.1)
  Top Layer w1: OUT7.P5@66.1,65.088 68.612,65.088 CM7.2@69.1,64.6 71.465,62.235 D7.6@72.69,62.235
  Bottom Layer w0.3: v1(70.2,57.1) 70,57.3 70,62.5 v1(70.2,62.7)
M7B: CM7.1 D7.8 LEDG7.1 LEDY7.2 OUT7.P4 | length 14
  Top Layer w0.3: LEDY7.2@70.302,54.1 LEDG7.1@70.302,56.1 71.202,57.001 71.202,59.694
  Top Layer w1: OUT7.P4@66.1,63.106 67.393,63.106 CM7.1@69.1,61.4 ; CM7.1@69.1,61.4 69.1,61.3 70.705,59.694 D7.8@72.69,59.695
M8A: CM8.2 D8.6 OUT8.P5 RM8.1 | length 16.9
  Top Layer w0.25: CM8.2@89.1,106.6 89.1,105.8 v1(90.2,104.7) ; RM8.1@90,100.1 90,99.3 v1(90.2,99.1)
  Top Layer w1: OUT8.P5@86.1,107.088 88.612,107.088 CM8.2@89.1,106.6 91.465,104.235 D8.6@92.59,104.235
  Bottom Layer w0.25: v1(90.2,99.1) 89.999,99.3 89.999,104.5 v1@90.2,104.701
M8B: CM8.1 D8.8 LEDG8.1 LEDY8.2 OUT8.P4 | length 13.9
  Top Layer w0.3: LEDY8.2@90.302,96.1 LEDG8.1@90.302,98.1 91.21,99.008 91.21,101.696
  Top Layer w1: OUT8.P4@86.1,105.107 87.394,105.107 CM8.1@89.1,103.4 89.1,103.301 90.705,101.696 D8.8@92.59,101.696
M9A: CM9.2 D9.6 OUT9.P5 RM9.1 | length 17
  Top Layer w0.25: CM9.2@89.1,92.6 89.1,91.9 v1(90.2,90.8) ; RM9.1@90,86.1 90,85.5 v1(90.4,85.1)
  Top Layer w1: OUT9.P5@86.1,93.088 88.6,93.1 CM9.2@89.1,92.6 91.465,90.235 D9.6@92.59,90.235
  Bottom Layer w0.25: v1(90.2,90.8) 89.999,90.601 89.999,85.501 v1(90.4,85.1)
M9B: CM9.1 D9.8 LEDG9.1 LEDY9.2 OUT9.P4 | length 13.9
  Top Layer w0.3: LEDY9.2@90.302,82.1 LEDG9.1@90.302,84.1 91.21,85.008 91.21,87.695
  Top Layer w1: OUT9.P4@86.1,91.107 87.393,91.107 CM9.1@89.1,89.4 ; CM9.1@89.1,89.4 89.1,89.3 90.705,87.695 D9.8@92.59,87.695
M10A: CM10.2 D10.6 OUT10.P5 RM10.1 | length 16.9
  Top Layer w0.25: CM10.2@89.1,78.6 89.1,77.8 v1(90.2,76.7) ; RM10.1@90,72.1 90,71.3 v1(90.2,71.1)
  Top Layer w1: OUT10.P5@86.1,79.088 88.6,79.1 CM10.2@89.1,78.6 ; CM10.2@89.1,78.6 91.465,76.235 D10.6@92.59,76.235
  Bottom Layer w0.25: v1(90.2,71.1) 89.999,71.3 89.999,76.499 v1(90.2,76.7)
M10B: CM10.1 D10.8 LEDG10.1 LEDY10.2 OUT10.P4 | length 13.9
  Top Layer w0.3: LEDY10.2@90.302,68.1 LEDG10.1@90.302,70.1 91.228,71.026 91.228,73.695
  Top Layer w1: OUT10.P4@86.1,77.107 87.393,77.107 CM10.1@89.1,75.4 ; CM10.1@89.1,75.4 89.1,75.3 90.705,73.695 D10.8@92.59,73.695
M11A: CM11.2 D11.6 OUT11.P5 RM11.1 | length 17.1
  Top Layer w0.25: CM11.2@89.1,64.7 89.1,63.9 v1(90.2,62.8) ; RM11.1@90,58.1 90,57.4 v1(90.3,57.1)
  Top Layer w1: OUT11.P5@86.1,65.088 88.712,65.088 CM11.2@89.1,64.7 91.565,62.235 D11.6@92.59,62.235
  Bottom Layer w0.25: v1@90.2,62.801 89.999,62.6 89.999,57.401 v1@90.299,57.101
M11B: CM11.1 D11.8 LEDG11.1 LEDY11.2 OUT11.P4 | length 14
  Top Layer w0.3: LEDY11.2@90.302,54.1 LEDG11.1@90.302,56.1 91.217,57.016 91.217,59.694
  Top Layer w1: OUT11.P4@86.1,63.106 87.493,63.106 CM11.1@89.1,61.5 ; CM11.1@89.1,61.5 89.1,61.3 90.705,59.694 D11.8@92.59,59.695
M12A: CM12.2 D12.6 OUT12.P5 RM12.1 | length 17
  Top Layer w0.25: CM12.2@109.1,106.7 109.1,105.9 v1(110.2,104.8) ; RM12.1@110,100.1 110,99.4 v1(110.3,99.1)
  Top Layer w1: OUT12.P5@106.1,107.088 108.701,107.101 CM12.2@109.1,106.7 ; CM12.2@109.1,106.7 111.565,104.235 D12.6@112.59,104.235
  Bottom Layer w0.25: v1(110.2,104.8) 110.101,104.701 110.101,99.3 v1(110.3,99.1)
M12B: CM12.1 D12.8 LEDG12.1 LEDY12.2 OUT12.P4 | length 14
  Top Layer w0.3: LEDY12.2@110.302,96.1 LEDG12.1@110.302,98.1 111.207,99.005 111.207,101.696
  Top Layer w1: OUT12.P4@106.1,105.107 107.494,105.107 CM12.1@109.1,103.5 ; CM12.1@109.1,103.5 109.1,103.301 110.705,101.696 D12.8@112.59,101.696
M13A: CM13.2 D13.6 OUT13.P5 RM13.1 | length 17.1
  Top Layer w0.25: CM13.2@109.1,92.7 109.1,91.9 v1(110.2,90.8) ; RM13.1@110,86.1 110,85.5 v1(110.4,85.1)
  Top Layer w1: OUT13.P5@106.1,93.088 108.712,93.088 CM13.2@109.1,92.7 ; CM13.2@109.1,92.7 109.1,92.6 111.439,90.261 D13.6@112.603,90.26
  Bottom Layer w0.25: v1(110.2,90.8) 110.101,90.7 110.101,85.399 v1(110.4,85.1)
M13B: CM13.1 D13.8 LEDG13.1 LEDY13.2 OUT13.P4 | length 14.1
  Top Layer w0.3: LEDY13.2@110.302,82.1 LEDG13.1@110.302,84.1 111.182,84.98 111.182,87.721
  Top Layer w1: OUT13.P4@106.1,91.107 107.493,91.107 CM13.1@109.1,89.5 ; CM13.1@109.1,89.501 109.1,89.199 110.578,87.721 D13.8@112.603,87.72
M14A: CM14.2 D14.6 OUT14.P5 RM14.1 | length 19.6
  Top Layer w0.25: CM14.2@109.1,78.6 110.299,77.401 110.302,76.395 ; CM14.2@109.1,78.6 109.1,77.8 v1(110.2,76.7) ; RM14.1@110,72.1 110,71.4 v1(110.3,71.1)
  Top Layer w1: OUT14.P5@106.1,79.088 108.612,79.088 CM14.2@109.1,78.6 ; CM14.2@109.1,78.6 111.465,76.235 D14.6@112.59,76.235
  Bottom Layer w0.25: v1(110.2,76.7) 110.101,76.6 110.101,71.3 v1(110.3,71.1)
M14B: CM14.1 D14.8 LEDG14.1 LEDY14.2 OUT14.P4 | length 13.9
  Top Layer w0.3: LEDY14.2@110.302,68.1 LEDG14.1@110.302,70.1 111.182,70.98 111.182,73.695
  Top Layer w1: OUT14.P4@106.1,77.107 107.393,77.107 CM14.1@109.1,75.4 ; CM14.1@109.1,75.4 109.1,75.3 110.705,73.695 D14.8@112.59,73.695
M15A: CM15.2 D15.6 OUT15.P5 RM15.1 | length 17
  Top Layer w0.25: CM15.2@109.1,64.7 109.1,64 v1(110.2,62.9) ; RM15.1@110,58.1 110,57.4 v1(110.3,57.1)
  Top Layer w1: OUT15.P5@106.1,65.088 108.713,65.088 CM15.2@109.1,64.7 111.565,62.235 D15.6@112.59,62.235
  Bottom Layer w0.25: v1(110.2,62.9) 110.101,62.801 110.101,57.299 v1@110.299,57.101
M15B: CM15.1 D15.8 LEDG15.1 LEDY15.2 OUT15.P4 | length 14
  Top Layer w0.3: LEDY15.2@110.302,54.1 LEDG15.1@110.302,56.1 111.156,56.954 111.156,59.694
  Top Layer w1: OUT15.P4@106.1,63.106 107.494,63.106 CM15.1@109.1,61.5 109.1,61.2 110.604,59.694 D15.8@112.59,59.695
M16A: CM16.2 D16.6 OUT16.P5 RM16.1 | length 17.1
  Top Layer w0.25: CM16.2@129.1,106.7 129.1,106 v1(130.3,104.8) ; RM16.1@130,100.1 130,99.4 v1(130.3,99.1)
  Top Layer w1: OUT16.P5@126.1,107.088 128.712,107.088 CM16.2@129.1,106.7 131.565,104.235 D16.6@132.59,104.235
  Bottom Layer w0.25: v1(130.3,99.1) 129.999,99.4 129.999,104.5 v1(130.3,104.8)
M16B: CM16.1 D16.8 LEDG16.1 LEDY16.2 OUT16.P4 | length 14
  Top Layer w0.3: LEDY16.2@130.302,96.1 LEDG16.1@130.302,98.1 131.222,99.021 131.222,101.696
  Top Layer w1: OUT16.P4@126.1,105.107 127.494,105.107 CM16.1@129.1,103.5 ; CM16.1@129.1,103.5 129.1,103.301 130.705,101.696 D16.8@132.59,101.696
M17A: CM17.2 D17.6 OUT17.P5 RM17.1 | length 17.1
  Top Layer w0.25: CM17.2@129.1,92.7 129.1,92 v1(130.2,90.9) ; RM17.1@130,86.1 130,85.4 v1(130.3,85.1)
  Top Layer w1: OUT17.P5@126.1,93.088 128.712,93.088 CM17.2@129.1,92.7 131.54,90.26 D17.6@132.603,90.26
  Bottom Layer w0.25: v1@130.2,90.901 129.999,90.7 129.999,85.399 v1(130.3,85.1)
M17B: CM17.1 D17.8 LEDG17.1 LEDY17.2 OUT17.P4 | length 14
  Top Layer w0.3: LEDY17.2@130.302,82.1 LEDG17.1@130.302,84.1 ; LEDG17.1@130.302,84.1 131.203,85.001 131.203,87.721
  Top Layer w1: OUT17.P4@126.1,91.107 127.493,91.107 CM17.1@129.1,89.5 ; CM17.1@129.1,89.501 129.1,89.3 130.68,87.721 D17.8@132.603,87.72
M18A: CM18.2 D18.6 OUT18.P5 RM18.1 | length 17.1
  Top Layer w0.25: CM18.2@129.1,78.7 129.1,78 v1(130.2,76.9) ; RM18.1@130,72.1 130,71.5 v1(130.4,71.1)
  Top Layer w1: OUT18.P5@126.1,79.088 128.712,79.088 CM18.2@129.1,78.7 131.565,76.235 D18.6@132.59,76.235
  Bottom Layer w0.25: v1(130.2,76.9) 129.999,76.7 129.999,71.5 v1(130.4,71.1)
M18B: CM18.1 D18.8 LEDG18.1 LEDY18.2 OUT18.P4 | length 14
  Top Layer w0.3: LEDY18.2@130.451,68.1 LEDG18.1@130.451,70.1 131.338,70.987 131.338,73.695
  Top Layer w1: OUT18.P4@126.1,77.107 127.493,77.107 CM18.1@129.1,75.5 129.1,75.3 130.705,73.695 D18.8@132.59,73.695
M19A: CM19.2 D19.6 OUT19.P5 RM19.1 | length 17.1
  Top Layer w0.25: CM19.2@129.1,64.7 129.1,64 v1(130.2,62.9) ; RM19.1@130,58.1 130,57.4 v1(130.3,57.1)
  Top Layer w1: OUT19.P5@126.1,65.088 128.712,65.088 CM19.2@129.1,64.7 131.565,62.235 D19.6@132.59,62.235
  Bottom Layer w0.25: v1(130.2,62.9) 129.999,62.699 129.999,57.401 v1@130.299,57.101
M19B: CM19.1 D19.8 LEDG19.1 LEDY19.2 OUT19.P4 | length 14.2
  Top Layer w0.3: LEDY19.2@130.302,54.1 LEDG19.1@130.302,56.1 ; LEDG19.1@130.302,55.868 131.215,56.78 131.215,59.694
  Top Layer w1: OUT19.P4@126.1,63.106 127.494,63.106 CM19.1@129.1,61.5 129.1,61.3 130.705,59.694 D19.8@132.59,59.695
M20A: CM20.2 D20.6 OUT20.P5 RM20.1 | length 17
  Top Layer w0.25: CM20.2@149.1,106.7 149.1,106 v1(150.2,104.9) ; RM20.1@150,100.1 150,99.3 v1(150.2,99.1)
  Top Layer w1: OUT20.P5@146.1,107.088 148.712,107.088 CM20.2@149.1,106.7 151.565,104.235 D20.6@152.59,104.235
  Bottom Layer w0.25: v1(150.2,99.1) 149.999,99.3 149.999,104.701 v1@150.2,104.901
M20B: CM20.1 D20.8 LEDG20.1 LEDY20.2 OUT20.P4 | length 14
  Top Layer w0.3: LEDY20.2@150.451,96.1 LEDG20.1@150.451,98.1 151.35,99 151.35,101.696
  Top Layer w1: OUT20.P4@146.1,105.107 147.493,105.107 CM20.1@149.1,103.5 ; CM20.1@149.1,103.5 149.1,103.301 150.705,101.696 D20.8@152.59,101.696
M21A: CM21.2 D21.6 OUT21.P5 RM21.1 | length 17
  Top Layer w0.25: CM21.2@149.1,92.7 149.1,92 v1(150.2,90.9) ; RM21.1@150,86.1 150,85.3 v1(150.2,85.1)
  Top Layer w1: OUT21.P5@146.1,93.088 148.712,93.088 CM21.2@149.1,92.7 151.565,90.235 D21.6@152.59,90.235
  Bottom Layer w0.25: v1(150.2,85.1) 149.999,85.3 149.999,90.7 v1@150.2,90.901
M21B: CM21.1 D21.8 LEDG21.1 LEDY21.2 OUT21.P4 | length 14
  Top Layer w0.3: LEDY21.2@150.302,82.1 LEDG21.1@150.302,84.1 ; LEDG21.1@150.302,84.1 151.209,85.007 151.209,87.695
  Top Layer w1: OUT21.P4@146.1,91.107 147.493,91.107 CM21.1@149.1,89.5 ; CM21.1@149.1,89.501 149.1,89.3 150.705,87.695 D21.8@152.59,87.695
M22A: CM22.2 D22.6 OUT22.P5 RM22.1 | length 17.1
  Top Layer w0.25: CM22.2@149.1,78.7 149.1,78 v1(150.3,76.8) ; RM22.1@150,72.1 150,71.4 v1(150.3,71.1)
  Top Layer w1: OUT22.P5@146.1,79.088 148.712,79.088 CM22.2@149.1,78.7 151.565,76.235 D22.6@152.59,76.235
  Bottom Layer w0.25: v1(150.3,71.1) 149.999,71.401 149.999,76.499 v1@150.299,76.801
M22B: CM22.1 D22.8 LEDG22.1 LEDY22.2 OUT22.P4 | length 14
  Top Layer w0.3: LEDY22.2@150.302,68.1 LEDG22.1@150.302,70.1 151.218,71.016 151.218,73.695
  Top Layer w1: OUT22.P4@146.1,77.107 147.493,77.107 CM22.1@149.1,75.5 149.1,75.3 150.705,73.695 D22.8@152.59,73.695
M23A: CM23.2 D23.6 OUT23.P5 RM23.1 | length 17
  Top Layer w0.25: CM23.2@149.1,64.7 149.1,63.9 v1(150.2,62.8) ; RM23.1@150,58.1 150,57.3 v1(150.2,57.1)
  Top Layer w1: OUT23.P5@146.1,65.088 148.712,65.088 CM23.2@149.1,64.7 151.565,62.235 D23.6@152.59,62.235
  Bottom Layer w0.25: v1@150.2,57.101 149.999,57.299 149.999,62.6 v1@150.2,62.801
M23B: CM23.1 D23.8 LEDG23.1 LEDY23.2 OUT23.P4 | length 14
  Top Layer w0.3: LEDY23.2@150.302,54.1 LEDG23.1@150.302,56.1 151.205,57.003 151.205,59.694
  Top Layer w1: OUT23.P4@146.1,63.106 147.493,63.106 CM23.1@149.1,61.5 149.1,61.3 150.705,59.694 D23.8@152.59,59.695
null: 
OPTION: EXTRA.2 pad.5 | length 34.2
  Top Layer w0.3: v1(181,56.1) 191,46.1 194.64,46.1 EXTRA.2@196.83,48.29
  Bottom Layer w0.3: pad.5@168.67,58.4 170.97,56.1 v1(181,56.1)
POS0: OUT0.P3 RPLP0.2 | length 9.5
  Top Layer w0.3: OUT0.P3@46.1,103.076 46.724,103.076 47.6,102.2 47.6,96.4 RPLP0.2@46.3,95.1
POS1: OUT1.P3 RPLP1.2 | length 9.5
  Top Layer w0.3: OUT1.P3@46.1,89.1 46.6,89.1 47.6,88.1 47.6,82.4 RPLP1.2@46.3,81.1
POS2: OUT2.P3 RPLP2.2 | length 9.5
  Top Layer w0.3: OUT2.P3@46.1,75.1 46.6,75.1 47.6,74.1 47.6,68.4 RPLP2.2@46.3,67.1
POS3: OUT3.P3 RPLP3.2 | length 9.5
  Top Layer w0.3: OUT3.P3@46.1,61.1 46.6,61.1 47.6,60.1 47.6,54.4 RPLP3.2@46.3,53.1
POS4: OUT4.P3 RPLP4.1 | length 9.3
  Top Layer w0.3: OUT4.P3@66.1,103.088 66.512,103.088 67.6,102 67.6,96.324 RPLP4.1@66.4,95.124
POS5: OUT5.P3 RPLP5.1 | length 9.4
  Top Layer w0.3: OUT5.P3@66.1,89.112 66.488,89.112 67.6,88 67.6,82.412 RPLP5.1@66.3,81.112
POS6: OUT6.P3 RPLP6.1 | length 9.4
  Top Layer w0.3: OUT6.P3@66.1,75.112 66.588,75.112 67.6,74.1 67.6,68.412 RPLP6.1@66.3,67.112
POS7: OUT7.P3 RPLP7.1 | length 9.4
  Top Layer w0.3: OUT7.P3@66.1,61.1 66.499,61.099 67.599,59.999 67.599,54.411 RPLP7.1@66.301,53.113
POS8: OUT8.P3 RPLP8.2 | length 9.4
  Top Layer w0.3: OUT8.P3@86.1,103.1 86.499,103.1 87.599,102 87.599,96.301 RPLP8.2@86.4,95.1
POS9: OUT9.P3 RPLP9.2 | length 9.4
  Top Layer w0.3: OUT9.P3@86.1,89.1 86.6,89.1 87.6,88.1 87.6,82.3 RPLP9.2@86.4,81.1
POS10: OUT10.P3 RPLP10.2 | length 9.4
  Top Layer w0.3: OUT10.P3@86.1,75.1 86.6,75.1 87.6,74.1 87.6,68.3 RPLP10.2@86.4,67.1
POS11: OUT11.P3 RPLP11.2 | length 9.4
  Top Layer w0.3: OUT11.P3@86.1,61.1 86.6,61.1 87.6,60.1 87.6,54.3 RPLP11.2@86.4,53.1
POS12: OUT12.P3 RPLP12.1 | length 9.4
  Top Layer w0.3: OUT12.P3@106.1,103.1 106.6,103.1 107.6,102.1 107.6,96.3 RPLP12.1@106.4,95.1
POS13: OUT13.P3 RPLP13.1 | length 9.4
  Top Layer w0.3: OUT13.P3@106.1,89.1 106.601,89.1 107.599,88.099 107.599,82.3 RPLP13.1@106.4,81.1
POS14: OUT14.P3 RPLP14.1 | length 9.4
  Top Layer w0.3: OUT14.P3@106.1,75.1 106.6,75.1 107.6,74.1 107.6,68.3 RPLP14.1@106.4,67.1
POS15: OUT15.P3 RPLP15.1 | length 9.4
  Top Layer w0.3: OUT15.P3@106.1,61.1 106.6,61.1 107.6,60.1 107.6,54.3 RPLP15.1@106.4,53.1
POS16: OUT16.P3 RPLP16.2 | length 9.4
  Top Layer w0.3: OUT16.P3@126.1,103.1 126.6,103.1 127.6,102.1 127.6,96.3 RPLP16.2@126.4,95.1
POS17: OUT17.P3 RPLP17.2 | length 9.4
  Top Layer w0.3: OUT17.P3@126.1,89.1 126.6,89.1 127.6,88.1 127.6,82.3 RPLP17.2@126.4,81.1
POS18: OUT18.P3 RPLP18.2 | length 9.4
  Top Layer w0.3: OUT18.P3@126.1,75.1 126.6,75.1 127.6,74.1 127.6,68.3 RPLP18.2@126.4,67.1
POS19: OUT19.P3 RPLP19.2 | length 9.4
  Top Layer w0.3: OUT19.P3@126.1,61.1 126.6,61.1 127.6,60.1 127.6,54.3 RPLP19.2@126.4,53.1
POS20: OUT20.P3 RPLP20.1 | length 9.4
  Top Layer w0.3: OUT20.P3@146.1,103.1 146.6,103.1 147.6,102.1 147.6,96.3 RPLP20.1@146.4,95.1
POS21: OUT21.P3 RPLP21.1 | length 9.4
  Top Layer w0.3: OUT21.P3@146.1,89.1 146.6,89.1 147.6,88.1 147.6,82.3 RPLP21.1@146.4,81.1
POS22: OUT22.P3 RPLP22.1 | length 9.4
  Top Layer w0.3: OUT22.P3@146.1,75.1 146.6,75.1 147.6,74.1 147.6,68.3 RPLP22.1@146.4,67.1
POS23: OUT23.P3 RPLP23.1 | length 9.4
  Top Layer w0.3: OUT23.P3@146.1,61.1 146.6,61.1 147.6,60.1 147.6,54.3 RPLP23.1@146.4,53.1
POSITION0_CS: POSITION0.1 RPOS0CS.2 | length 304.9
  Top Layer w0.25: POSITION0.1@53.062,52.513 53.075,52.5 v1(54.6,52.5) ; v1(54.8,46.1) 58.1,42.8 172.9,42.8 ; 64,42.801 172.9,42.801 ; 172.9,42.801 180.101,50.002 ; 172.9,42.8 180.101,50.002 ; 176.1,71.101 180.101,67.098 ; 176.1,71.101 174.8,71.101 176.1,71.101 ; 176.1,71.101 180.101,67.098 ; 180.101,50.002 180.101,67.098 ; 180.101,50.002 180.101,67.098
  Bottom Layer w0.25: v1(54.6,52.5) 54.6,46.3 v1(54.8,46.1)
POSITION1_CS: POSITION1.1 RPOS1CS.2 | length 119.1
  Top Layer w0.25: v1(95.4,44.7) 96.8,43.3 172.8,43.3 179.6,50.101 179.6,65.6 176.1,69.1 RPOS1CS.2@174.8,69.1
  Top Layer w0.3: POSITION1.1@93.062,52.513 94.787,52.513 v1(95.4,51.9)
  Bottom Layer w0.3: v1(95.4,44.7) v1(95.4,51.9)
POSITION2_CS: POSITION2.1 RPOS2CS.2 | length 76.5
  Top Layer w0.25: v1(135.3,44.2) 135.7,43.8 172.7,43.8 179.1,50.2 179.1,64.101 176.1,67.101 RPOS2CS.2@174.8,67.101
  Top Layer w0.3: POSITION2.1@133.062,52.513 134.887,52.513 v1(135.5,51.9)
  Bottom Layer w0.3: v1(135.3,44.2) 135.5,44.4 v1(135.5,51.9)
POWER_BTN: pad.26 RPOW.1 | length 82.3
  Top Layer w0.3: pad.26@191.531,63.481 192.91,62.1 205.999,62.1 217.101,73.202 217.101,115.8 RPOW.1@210.8,122.1
POWER_CTRL: MOSON.1 pad.24 RCTRL.2 | length 65.3
  Top Layer w0.3: pad.24@191.531,58.401 193.23,60.101 v1@200.101,60.101 ; v1(200.9,84.1) 200.9,108.901 202.148,110.149 MOSON.1@204.35,110.15 204.401,110.101 206.301,110.101 RCTRL.2@206.6,110.4
  Bottom Layer w0.3: v1(200.1,60.1) 201.5,61.5 201.5,83.5 v1(200.9,84.1)
PWM0_1: PWM0.1 REXT0.2 | length 1.9
  Top Layer w0.25: PWM0.1@79.545,116.21 81.29,116.21 REXT0.2@81.4,116.1
PWM0A: D0.3 PWM0.6 RPWM0A.2 | length 27.1
  Top Layer w0.25: D0.3@58.71,104.235 59.435,104.235 v1(60,104.8) RPWM0A.2@61,104.8 ; v1(63.3,111.8) 63.5,112 74.481,112 76.294,113.813 PWM0.6@76.294,116.21
  Bottom Layer w0.25: v1(60,104.8) 60.101,104.901 60.101,108.301 63.3,111.5 v1(63.3,111.8)
PWM0B: D0.2 PWM0.7 RPWM0B.2 | length 29.8
  Top Layer w0.25: D0.2@58.71,102.965 59.435,102.965 v1(60,102.4) RPWM0B.2@61,102.4 ; v1@63.3,112.6 63.4,112.5 74.282,112.5 75.633,113.851 PWM0.7@75.633,116.21
  Bottom Layer w0.25: v1(60,102.4) 59.4,103.001 59.4,108.201 62.6,111.401 62.6,112 v1(63.2,112.6)
PWM1_2: PWM1.2 RPWM1UP.1 | length 5.1
  Top Layer w0.25: PWM1.2@118.885,116.11 118.884,114.815 121.4,112.299 RPWM1UP.1@121.4,112.1
PWM1A: D1.3 PWM0.8 RPWM1A.2 | length 40.2
  Top Layer w0.25: D1.3@58.723,90.26 59.36,90.26 v1(60,90.9) RPWM1A.2@61,90.9 ; v1@64,113.1 64.1,113 74.181,113 74.998,113.818 PWM0.8@74.998,116.21
  Bottom Layer w0.25: v1@59.999,90.901 60.599,91.5 60.599,108.201 64,111.599 v1@64,113.1
  other v1: 63.9,113.1
PWM1B: D1.2 PWM0.9 RPWM1B.2 | length 41.9
  Top Layer w0.25: D1.2@58.723,88.99 59.41,88.99 v1(60,88.4) RPWM1B.2@61,88.4 ; v1@64.6,113.6 64.7,113.5 73.982,113.5 74.338,113.856 PWM0.9@74.338,116.21
  Bottom Layer w0.25: v1(60,88.4) 61.099,89.499 61.099,108.099 64.599,111.599 v1@64.599,113.601
  other v1: 64.5,113.6
PWM2_1: PWM2.1 REXT2.2 | length 1.9
  Top Layer w0.25: PWM2.1@159.545,116.11 159.555,116.1 REXT2.2@161.4,116.1